# Altium PCB coreboardV0.1pcb.PcbDoc
Units mil, origin at the board's own origin, x right, y up, seen from the top; angles counter-clockwise.
Board outline 1683.26 x 2175.38 mil, 2 copper layers (Top Layer, Bottom Layer), stack 61.855 mil thick; 41 components, 94 nets, 325 pads, 137 vias.
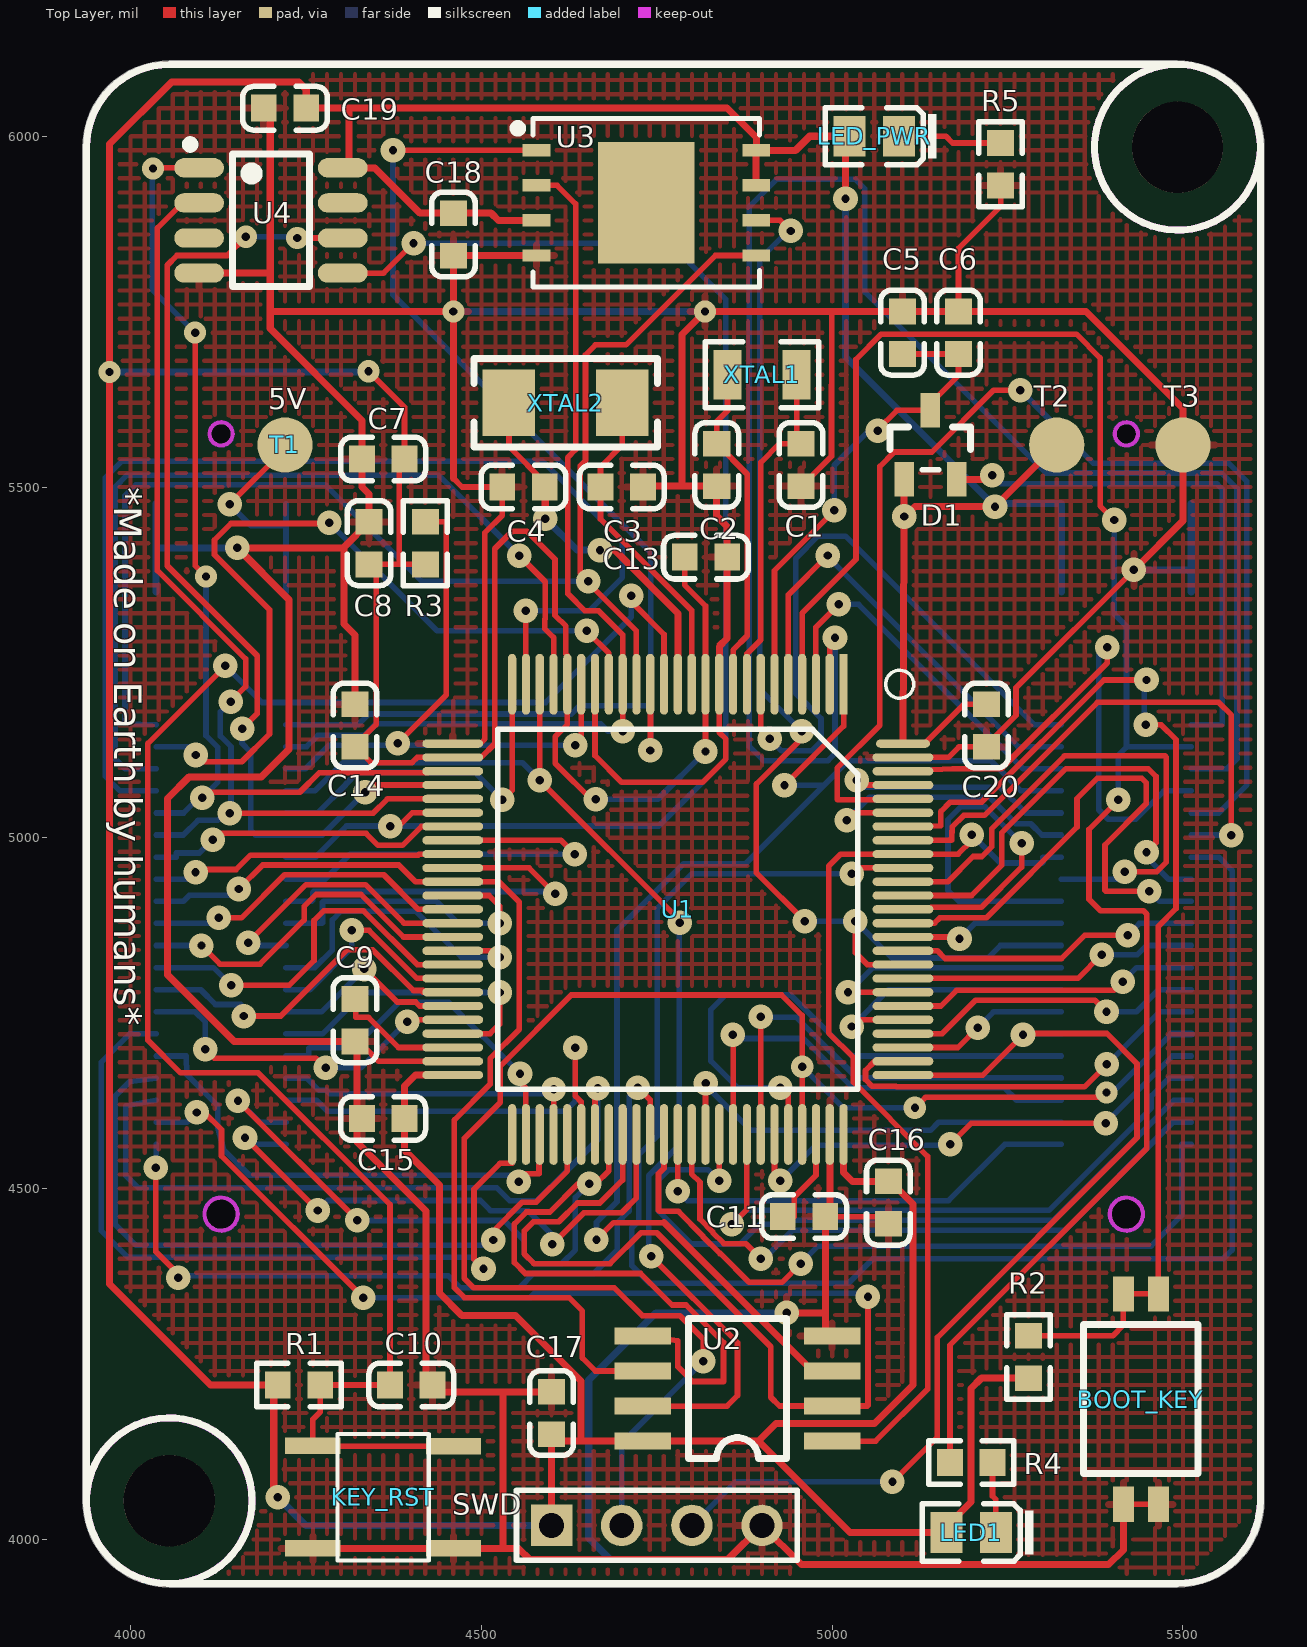
[diagram p0: Top Layer view]
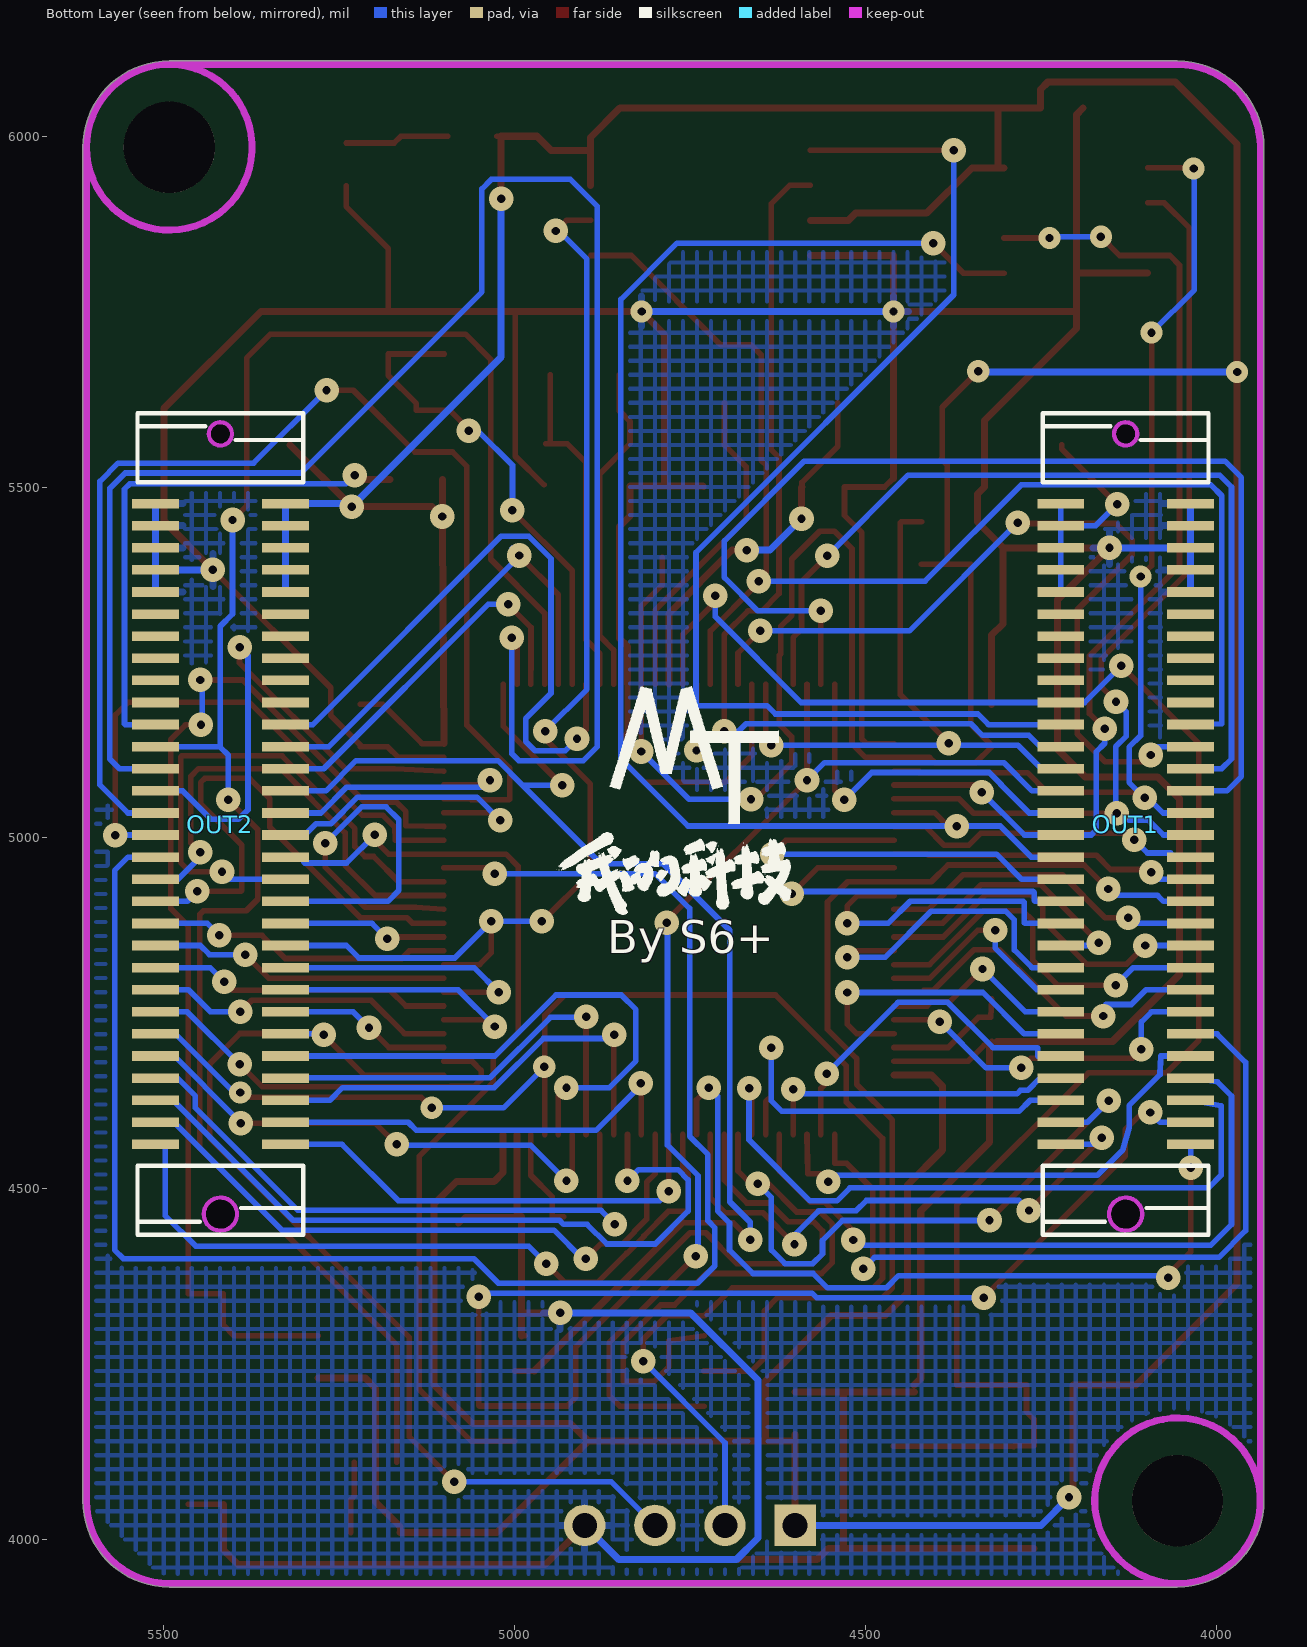
[diagram p1: Bottom Layer view, seen from below]
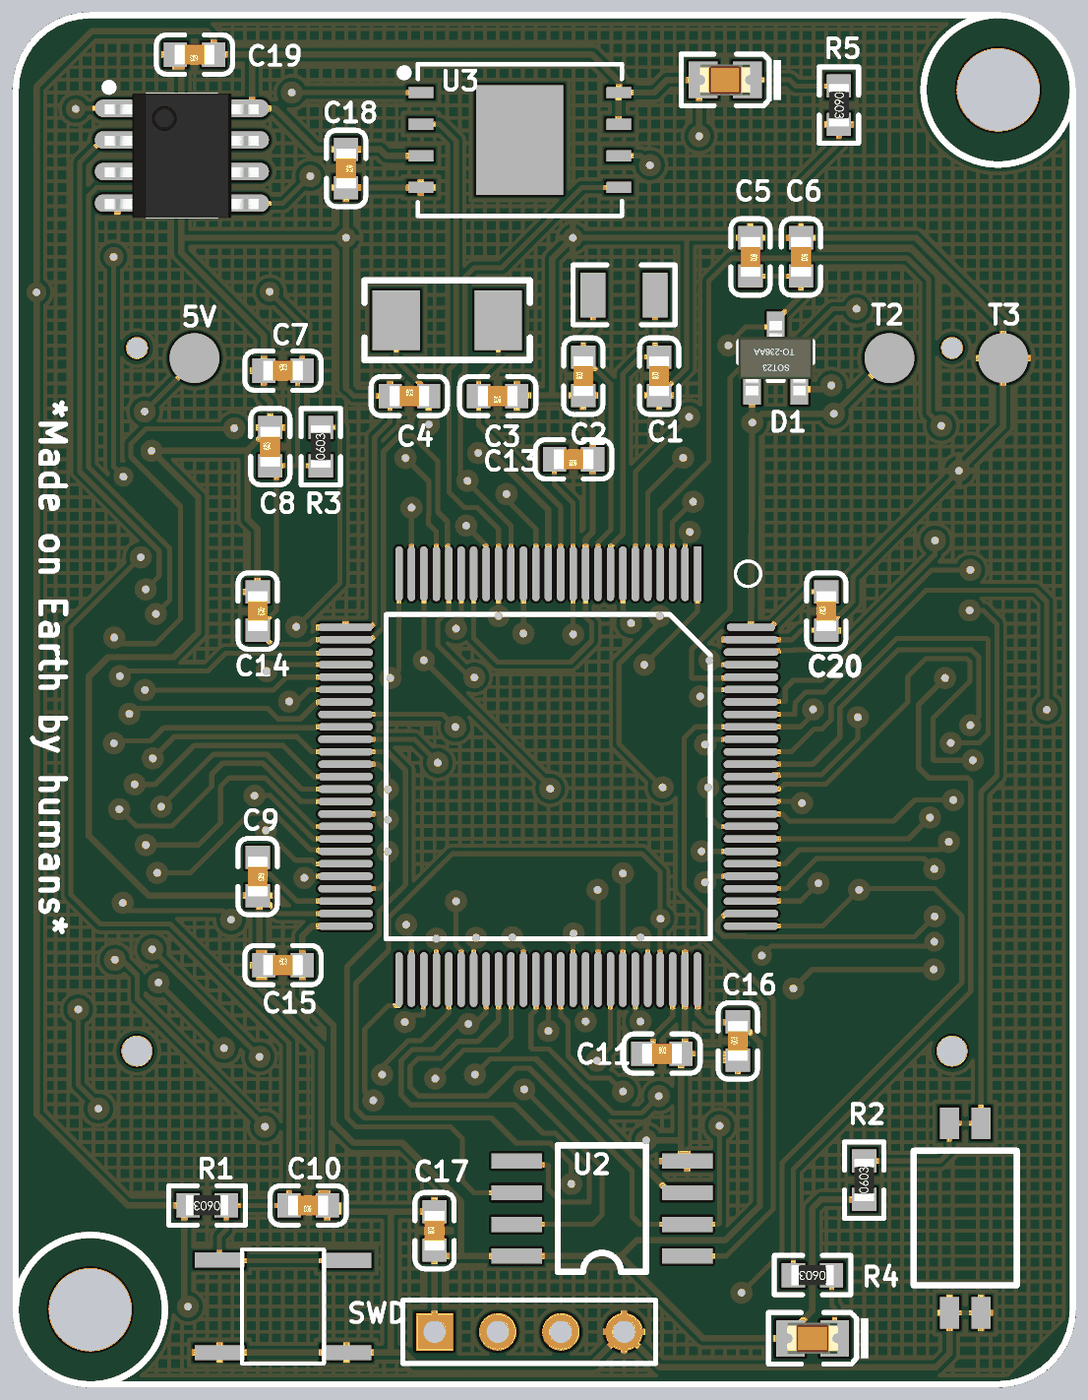
[diagram p2: 3D render of the assembled board from above, using the file's embedded part models]

## Layer stack, top to bottom
Top Solder: solder mask 0.4, Solder Resist, Dk 3.5
Top Layer: signal copper 1.4
Dielectric1: dielectric 59.0551, FR-4, Dk 4.8
Bottom Layer: signal copper 1.4
Bottom Solder: solder mask 0.4, Solder Resist, Dk 3.5

## Board outline
4055.12,3931.99 cw(c4055.12,4055.12) 3931.99,4055.12 3931.99,5984.25 cw(c4055.12,5984.25) 4055.12,6107.38 5492.13,6107.38 cw(c5492.13,5984.25) 5615.25,5984.25 5615.25,4055.12 cw(c5492.13,4055.12) 5492.13,3931.99

## Design rules (kind name [scope] priority, off if disabled: settings)
Clearance [All] p1: gap=6 ignorepadtopadclearanceinfootprint=FALSE except(0: Arc-Hole Track-Hole SMDPad-Hole THPad-Hole Via-Hole Fill-Hole Poly-Hole Region-Hole Text-Hole)
ComponentClearance [All] p1 off: gap=10 collisioncheckmode=3 verticalgap=10 showdistances=FALSE
FabricationTestPointUsage TestPointUsage [All] p1: valid=0 allowmultiple=FALSE
FabricationTestpoint Testpoint [All] p1: side=3 testpointundercomponent=TRUE minsize=40 maxsize=100 preferedsize=60 minholesize=0 maxholesize=40 preferedholesize=32 testpointgrid=1 allowsidetop=TRUE allowsidebottom=TRUE usegrid=TRUE gridtolerance=0.01
MinimumSolderMaskSliver [All] p1: minsoldermaskwidth=6
PolygonConnect [All] p1: connectstyle=Relief reliefconductorwidth=10 reliefentries=4 polygonreliefangle="90 Angle" airgapwidth=10
RoutingVias [All] p1: holewidth=12 width=35 viastyle="Through Hole" minholewidth=11 minwidth=31 maxholewidth=200 maxwidth=200
SilkToSilkClearance [All] p1 off: silktosilkclearance=10
SilkToSolderMaskClearance SilkscreenOverComponentPads [IsPad] p1 off: minsilkscreentomaskgap=10 clearancetoexposedcopper=TRUE
SolderMaskExpansion [All] p1: expansion=4
Width [All] p1: maxlimit=20 minlimit=6 preferedwidth=8
24 further rules are at their usual default settings.

## Components (designator, comment, footprint, x,y, rotation, side; value= is the part's Value field where it differs from the comment)
BOOT_KEY "KE_2" KE_2_1.27 5440,4200 r270 top
C1 "6pF" 0603_C 4955.43,5531.5 r90 top
C2 "6pF" 0603_C 4835.43,5531.5 r90 top
C3 "22pF" 0603_C 4700,5500 r180 top
C4 "22pF" 0603_C 4560,5500 r0 top
C5 "100nF" 0603_C 5100,5720 r270 top
C6 "10uF" 0603_C 5180,5720 r270 top
C7 "100nF" 0603_C 4360,5540 r0 top
C8 "1uF" 0603_C 4340,5420 r90 top
C9 "1uF" 0603_C 4320,4740 r270 top
C10 "100nF" 0603_C 4400,4220 r180 top
C11 "1uF" 0603_C 4960,4460 r0 top
C13 "100nF" 0603_C 4820,5400 r180 top
C14 "100nF" 0603_C 4320,5160 r270 top
C15 "100nF" 0603_C 4360,4600 r0 top
C16 "100nF" 0603_C 5080,4480 r90 top
C17 "100nF" 0603_C 4600,4180 r90 top
C18 "100nF" 0603_C 4460,5860 r270 top
C19 "100nF" 0603_C 4220,6040 r180 top
C20 "100nF" 0603_C 5220,5160 r90 top
D1 "BAT54C" BAT54C 5140,5560 r90 top
KEY_RST "KEY_SMT" KEY_SMT 4360,4060 r180 top
LED1 "0805_LED" 0805_LED 5198.27,4009.76 r0 top
LED_PWR "0805_LED" 0805_LED 5060,6000 r0 top
OUT1 "3710F" 3710F060046G3FT01 4035.43,5476.38 r180 bottom locked
OUT2 "3710F" 3710F060046G3FT01 5325.79,5476.38 r180 bottom locked
R1 "10K" 0603_R 4240,4220 r180 top
R2 "10K" 0603_R 5280,4260 r90 top
R3 "0R" 0603_R 4420,5420 r90 top
R4 "1K" 0603_R 5198.27,4109.76 r180 top
R5 "1K" 0603_R 5240,5960 r270 top
SWD "Header_2.54_4P" HDR1_4P 4600,4020 r0 top
T1 "5V" TEST_POINT_2mm 4220,5560 r0 top locked
T2 "3V3" TEST_POINT_2mm 5320,5560 r0 top locked
T3 "GND" TEST_POINT_2mm 5500,5560 r0 top locked
U1 "STM32H750VBT6" LQFP100 4780,4900 r270 top locked
U2 "W25Q64" SOIC8-208MIL 5000,4140 r180 top
U3 "W25Q256" WSON8 4580,5980 r0 top
U4 "LY68L6400" SOP8-150MIL 4200,5880 r0 top
XTAL1 "32.768K" XTAL_32.768_3215_2 4900,5660 r0 top
XTAL2 "25M" XTAL_5032_2 4620,5620 r0 top

## Footprints (in the part's own frame and the unit in brackets; to place one, negate y for a bottom-side part, rotate by r counter-clockwise, add the part's x,y. Pads: shape width x height; smd on the part's side, far side on the other; paste and mask are expansions set on the pad)
0603_C [mm]
  rect 0.93x0.98 smd: 1(-0.77,0) 2(0.77,0)
  silkscreen extent -1.54,-0.79 1.54,0.79, body extent -0.8,-0.4 0.8,0.4, height 0.3
0603_R [mm]
  rect 0.93x0.98 smd: 1(-0.77,0) 2(0.77,0)
  silkscreen extent -1.54,-0.79 1.54,0.79, body extent -0.85,-0.4 0.85,0.4, height 0.56
0805_LED [mm]
  rect 1.16x1.47 smd: A(-0.89,0) K(0.89,0)
  silkscreen extent -1.77,-1.03 2.25,1.04, body extent -1.01,-0.62 1.01,0.63, height 1.1
3710F060046G3FT01 [mm]
  rect 1.7x0.35 smd: 1(-4.725,0) 2(-4.725,-0.8) 3(-4.725,-1.6) 4(-4.725,-2.4) 5(-4.725,-3.2) 6(-4.725,-4) 7(-4.725,-4.8) 8(-4.725,-5.6) 9(-4.725,-6.4) 10(-4.725,-7.2) 11(-4.725,-8) 12(-4.725,-8.8) 13(-4.725,-9.6) 14(-4.725,-10.4) 15(-4.725,-11.2) 16(-4.725,-12) 17(-4.725,-12.8) 18(-4.725,-13.6) 19(-4.725,-14.4) 20(-4.725,-15.2) 21(-4.725,-16) 22(-4.725,-16.8) 23(-4.725,-17.6) 24(-4.725,-18.4) 25(-4.725,-19.2) 26(-4.725,-20) 27(-4.725,-20.8) 28(-4.725,-21.6) 29(-4.725,-22.4) 30(-4.725,-23.2) 31(-0.025,-23.2) 32(-0.025,-22.4) 33(-0.025,-21.6) 34(-0.025,-20.8) 35(-0.025,-20) 36(-0.025,-19.2) 37(-0.025,-18.4) 38(-0.025,-17.6) 39(-0.025,-16.8) 40(-0.025,-16) 41(-0.025,-15.2) 42(-0.025,-14.4) 43(-0.025,-13.6) 44(-0.025,-12.8) 45(-0.025,-12) 46(-0.025,-11.2) 47(-0.025,-10.4) 48(-0.025,-9.6) 49(-0.025,-8.8) 50(-0.025,-8) 51(-0.025,-7.2) 52(-0.025,-6.4) 53(-0.025,-5.6) 54(-0.025,-4.8) 55(-0.025,-4) 56(-0.025,-3.2) 57(-0.025,-2.4) 58(-0.025,-1.6) 59(-0.025,-0.8) 60(-0.025,0)
  Keep-Out Layer circle w0.152: c-2.375,-25.725 r0.6
  Keep-Out Layer circle w0.152: c-2.375,2.525 r0.42
  silkscreen extent -5.38,-26.47 0.63,3.28
BAT54C [mm]
  rect 1.25x0.7 smd: 1(-1.25,0.95) 2(-1.25,-0.95) 3(1.25,0)
  silkscreen extent -0.9,-1.46 0.65,1.46, body extent -1.5,-1.5 1.5,1.5, height 1.3
HDR1_4P [mm]
  rect 1.5x1.5 hole 0.9: 1(0,0)
  round 1.5 hole 0.9: 2(2.54,0) 3(5.08,0) 4(7.62,0)
  silkscreen extent -1.27,-1.27 8.89,1.27
KE_2_1.27 [mm]
  rect 1.27x0.76 smd: 1(-3.81,0.635) 2(-3.81,-0.635) 3(3.81,-0.635) 4(3.81,0.635)
  silkscreen extent -2.7,-2.07 2.7,2.07
KEY_SMT [mm]
  rect 2x0.6 smd: 1(-2.55,-1.85) 1(2.55,-1.87) 2(-2.55,1.85) 2(2.55,1.85)
  silkscreen extent -1.65,-2.29 1.65,2.29
LQFP100 [mm]
  rect 2.2x0.3 smd: 1(-8.1,6)
  oval 2.2x0.3 smd: 2(-8.1,5.5) 3(-8.1,5) 4(-8.1,4.5) 5(-8.1,4) 6(-8.1,3.5) 7(-8.1,3) 8(-8.1,2.5) 9(-8.1,2) 10(-8.1,1.5) 11(-8.1,1) 12(-8.1,0.5) 13(-8.1,0) 14(-8.1,-0.5) 15(-8.1,-1) 16(-8.1,-1.5) 17(-8.1,-2) 18(-8.1,-2.5) 19(-8.1,-3) 20(-8.1,-3.5) 21(-8.1,-4) 22(-8.1,-4.5) 23(-8.1,-5) 24(-8.1,-5.5) 25(-8.1,-6) 51(8.2,-6) 52(8.2,-5.5) 53(8.2,-5) 54(8.2,-4.5) 55(8.2,-4) 56(8.2,-3.5) 57(8.2,-3) 58(8.2,-2.5) 59(8.2,-2) 60(8.2,-1.5) 61(8.2,-1) 62(8.2,-0.5) 63(8.2,0) 64(8.2,0.5) 65(8.2,1) 66(8.2,1.5) 67(8.2,2) 68(8.2,2.5) 69(8.2,3) 70(8.2,3.5) 71(8.2,4) 72(8.2,4.5) 73(8.2,5) 74(8.2,5.5) 75(8.2,6)
  oval 0.3x2.2 smd: 26(-5.95,-8.15) 27(-5.45,-8.15) 28(-4.95,-8.15) 29(-4.45,-8.15) 30(-3.95,-8.15) 31(-3.45,-8.15) 32(-2.95,-8.15) 33(-2.45,-8.15) 34(-1.95,-8.15) 35(-1.45,-8.15) 36(-0.95,-8.15) 37(-0.45,-8.15) 38(0.05,-8.15) 39(0.55,-8.15) 40(1.05,-8.15) 41(1.55,-8.15) 42(2.05,-8.15) 43(2.55,-8.15) 44(3.05,-8.15) 45(3.55,-8.15) 46(4.05,-8.15) 47(4.55,-8.15) 48(5.05,-8.15) 49(5.55,-8.15) 50(6.05,-8.15) 76(6.05,8.15) 77(5.55,8.15) 78(5.05,8.15) 79(4.55,8.15) 80(4.05,8.15) 81(3.55,8.15) 82(3.05,8.15) 83(2.55,8.15) 84(2.05,8.15) 85(1.55,8.15) 86(1.05,8.15) 87(0.55,8.15) 88(0.05,8.15) 89(-0.45,8.15) 90(-0.95,8.15) 91(-1.45,8.15) 92(-1.95,8.15) 93(-2.45,8.15) 94(-2.95,8.15) 95(-3.45,8.15) 96(-3.95,8.15) 97(-4.45,8.15) 98(-4.95,8.15) 99(-5.45,8.15)
  oval 0.3x1.95 smd: 100(-5.95,8.15)
  silkscreen extent -8.61,-6.51 6.56,8.54
SOIC8-208MIL [mil]
  rect 80x24 smd: 1(0,0) 2(0,-50.06) 3(0,-100.06) 4(0,-150.06) 5(270,-150) 6(270,-100) 7(270,-50) 8(270,0)
  silkscreen extent 65,-175 205,25
SOP8-150MIL [mm]
  oval 1.8x0.7 smd: 1(-2.6,1.905) 2(-2.6,0.635) 3(-2.6,-0.635) 4(-2.6,-1.905) 5(2.6,-1.905) 6(2.6,-0.635) 7(2.6,0.635) 8(2.6,1.905)
  silkscreen extent -3.07,-2.4 1.4,2.9, body extent -3.1,-2.5 3.1,2.5, height 1.75
TEST_POINT_2mm [mm]
  round 2 smd: 1(0,0)
WSON8 [mm]
  rect 1x0.45 smd: 1(-0.038,0) 2(-0.038,-1.27) 3(-0.038,-2.54) 4(-0.038,-3.81) 5(7.912,-3.81) 6(7.912,-2.54) 7(7.912,-1.27) 8(7.912,0)
  rect 3.5x4.4 smd: 9(3.937,-1.905)
  silkscreen extent -0.86,-4.95 8.04,1.14
XTAL_32.768_3215_2 [mm]
  rect 1x1.8 smd: 1(-1.25,0) 2(1.25,0)
  silkscreen extent -2.05,-1.2 2.05,1.2
XTAL_5032_2 [mm]
  rect 1.9x2.4 smd: 1(-2.05,0) 2(2.05,0)
  silkscreen extent -3.33,-1.6 3.33,1.6

## Part data
BOOT_KEY: library part KE_2_1.27
C1 C2 C3 C4 C5 C6 C7 C8 C9 C10 C11 C13 C14 C15 C16 C17 C18 C19 C20: library part 0603_CAP
OUT1 OUT2: library part 3710F_30*2pin
R1 R2 R3 R4 R5: library part 0603_RES
T1 T2 T3: library part TEST_POINT_2mm
XTAL1: library part XTAL_32.768_3215_2
XTAL2: library part XTAL_8MHz_5032_2

## Free pads (board coordinates)
  round 129.92 hole 129.92: 0(4055,4055) 0(5492.13,5984.25)
  round 47.24 hole 47.24: 0(4129,4464) 0(5419,4464)
  round 33.07 hole 33.07: 0(4129,5576) 0(5419,5576)

## Via types
v1: diameter 35, hole 12, Top Layer to Bottom Layer, tented both sides, 125 vias
v2: diameter 31.5, hole 11.81, Top Layer to Bottom Layer, tented both sides, 10 vias
v3: diameter 32, hole 12, Top Layer to Bottom Layer, tented both sides, 2 vias

## Nets (pads, with @x,y where several pads share a name; then routed paths per layer and width w, separated by ;. In a path a pad name is that pad's centre, name@x,y a point inside that pad or via, vN(x,y) a via of type N, cw(c..) or ccw(c..) an arc to the next point about the centre after c; other vN are vias at no path point)
3V3: C7.2 C8.1 C13.2 C14.2 C15.2 C16.2 C17.1 C18.1 C19.1 C20.2 D1.1 LED1.A LED_PWR.A OUT2.56 OUT2.57 OUT2.58 OUT2.59 OUT2.60 R1.2 R2.1 R3.1 SWD.1 T2.1 U1.11 U1.21 U1.27 U1.50 U1.75 U1.100 U2.8 U3.3 U3.7 U3.8 U4.8 | length 10665
  Top Layer w8: C14.2@4319.09,5130.59 4350,5161.5 4350,5389.69 R3.1 ; C14.2 4342.6,5107.09 4401.12,5107.09 4408.6,5114.57 U1.27 4499.57,5114.57 4519,5134 4519,5412 4544,5437 4565,5437 4604.97,5397.03 4604.97,5317 4620.31,5301.66 4620.31,5262.3 4622.52,5260.09 U1.21 4622.52,5161.52 4605,5144 4605,5106.22 v1@4661,5050.22 ; v2(4339,5665) 4390.32,5613.68 C7.2 ; 4383,5389.69 4383,5531 C7.2@4392,5540 ; C13.2 4789.69,5360.31 4819.37,5330.63 U1.11 v1(4819.37,5123) ; U3.8 U3.8@4892,5980 ; LED_PWR.A@5019,6000 LED_PWR.A ; U1.100 5132,5134.25 5188.06,5190.32 C20.2 ; v1@5102.6,5458.4 v1@5103.45,5457.55 ; LED1.A@5163.23,4009 LED1.A@5163.23,4018.23
  Top Layer w10: v1(4209.68,4060) 4204,4065.68 4204,4220 4114,4220 3970,4364 v2(3970,5664) 3970,5989 4058,6077 4240,6077 4250.32,6066.68 C19.1 4850,6040 4892,5998 4892,5980 4948,5980 4968,6000 5019,6000 v1(5019,5911) ; U4.8 4348,5955 4412.68,5890.32 C18.1 4514,5890.32 4524.32,5880 U3.3 ; U4.8@4311,5955 4311,6040 ; U1.50 4405.81,4661.81 4390.31,4646.31 C15.2 4390.31,4554.69 4440,4505 4440,4351 4472,4319 4548.62,4319 4642,4225.62 4642,4140 ; SWD.1 C17.1 ; C17.1@4600,4140 U2.8 4895,4140 ; U3.7 U3.8 ; U1.75 5016.22,4522.78 5029,4510 5083,4510 5115,4478 5115,4219.8 5060.2,4165 4920,4165 4895,4140 ; U1.100 5102.6,5438.1 D1.1 ; v1@5103.45,5457.55 5117.95,5472.05 v1(5232.05,5472.05) T2.1 ; LED1.A 5025.24,4009.76 4895,4140 ; LED1.A@5163.23,4018.23 5198,4053 5198,4215.19 5212.5,4229.69 R2.1
  Bottom Layer w8: v1(4663,5055) 4751.37,5055 v1(4819.37,5123) ; v1@5227.72,5476.38 v1(5232.05,5472.05)
  Bottom Layer w10: v2(3970,5664) v2@4338,5664 ; v1(4209.68,4060) 4249.68,4020 SWD.1 ; v1(5019,5911) 5019,5685.1 5227.72,5476.38 OUT2.60 OUT2.59 OUT2.58 OUT2.57 OUT2.56
  other v1: 5103,5458
5V: OUT1.1 OUT1.2 OUT1.3 OUT1.4 OUT1.5 T1.1 | length 336.2
  Top Layer w8: v1(4141.12,5475.5) 4220,5554.38 T1.1
  Bottom Layer w8: v1(4141.12,5475.5) 4171.74,5444.88 OUT1.2 ; OUT1.5 OUT1.4 OUT1.3 OUT1.2 ; OUT1.1 OUT1.2
BOOT0: BOOT_KEY.1 BOOT_KEY.2 R2.2 U1.94 | length 1596.1
  Top Layer w8: U1.94 5155,5017.14 5155,5037.5 5168.18,5050.68 5213.09,5050.68 5387.42,5225 v1@5445,5225 ; R2.2 5400,4290.32 5415,4305.32 BOOT_KEY.2 BOOT_KEY.1 5465,4874 5490,4899 5490,5140 5469,5161 v1@5445,5161
  Bottom Layer w8: v1@5445,5161 v1@5445,5225
  other v1: 5447,5161 5448,5225
GND: BOOT_KEY.3 BOOT_KEY.4 C1.1 C2.1 C3.1 C4.1 C5.1 C6.1 C7.1 C8.2 C9.2 C10.1 C11.2 C13.1 C14.1 C15.1 C16.1 C17.2 C18.2 C19.2 C20.1 KEY_RST.2 OUT1.56 OUT1.57 OUT1.58 OUT1.59 OUT1.60 OUT2.1 OUT2.2 OUT2.3 OUT2.4 OUT2.5 R5.2 SWD.4 T3.1 U1.10 U1.19 U1.26 U1.49 U1.74 U1.99 U2.4 U3.4 U4.4 | length 10955.9
  Top Layer w8: C9.2@4312.5,4710 4323.28,4699.22 C9.2 ; C9.2@4331,4704 4353.5,4681.5 U1.49 ; C8.2@4340,5450 C8.2 ; U1.26 4498.44,5134.25 4505,5140.81 4505,5435 4529.69,5459.69 C4.1 4472.5,5500 4460,5512.5 ; U1.19 4661.89,5117.11 4700,5079 4815,5079 4848.5,5112.5 4848.5,5140.61 4839.06,5150.05 U1.10 ; C3.1 C3.1@4731.5,5501.18 ; C1.1@4958,5503 4999,5543.93 4999.18,5750.32 ; U2.4@4985,4290.06 U2.4@4990.32,4290.06 ; C11.2@4996.54,4466.22 C11.2 5069.68,4460 C16.1 ; U1.99 5165.57,5114.57 5180.69,5129.69 C20.1 ; C6.1 5180,5840 5240,5900 R5.2 ; C20.1@5218.59,5131.09 5262,5174.5 5262,5213.89 v1(5430,5381.89) ; BOOT_KEY.3 BOOT_KEY.4
  Top Layer w10: U4.4 4199,5805 ; C19.2 4199,6030.69 4199,5726 4330,5595 4330,5500 4340,5490 C8.2 ; 4199,5750.32 v2@4457.76,5750.32 ; KEY_RST.2@4259.61,3987.17 4460.39,3987.17 4552.83,3987.17 4569,3971 4851,3971 SWD.4 4956,3964 5394,3964 5415,3985 BOOT_KEY.3 ; 4304.5,5414.5 C8.2@4340,5450 ; C9.2@4312.5,4710 4147.31,4710 4052.5,4804.81 4052.5,5056 4083.5,5087 4186.76,5087 4226,5126.24 4226,5339.39 v1(4152,5413.39) 4304,5413.39 4304,5305 4320,5289 C14.1 ; C9.2@4322.68,4704 4322.68,4566.32 4421,4468 4421,4229.31 C10.1 ; C10.1@4430,4210.32 C17.2 ; 4460,5512.5 C18.2 U3.4@4578,5829.69 ; 4531,3987.17 4531,4210.32 ; C3.1@4731.5,5501.18 4786,5501.18 ; U1.10 4839.06,5273 4850.32,5284.26 4850.32,5443.68 4835.43,5458.57 C2.1 4786,5501.18 ; v1(4935,4323) 4989.32,4323 ; U2.4@4990.32,4290.06 C11.2 ; C11.2@4996.54,4466.22 U1.74 ; v1(5430,5381.89) 5500,5451.89 T3.1 5500,5612 5361.68,5750.32 C6.1 C5.1 v2(4818.82,5750.32) 4786,5717.5 4786,5501.18
  Bottom Layer w10: OUT1.56 OUT1.57 OUT1.58 ; OUT1.60 OUT1.59 OUT1.58 ; v1(4152,5413.39) OUT1.58 ; v2(4460,5750.32) v2(4818.82,5750.32) ; SWD.4 4851,3971 4684,3971 4653,4002 4653,4227 4749,4323 v1(4935,4323) ; v1(5430,5381.89) OUT2.4 ; OUT2.5 OUT2.4 ; OUT2.1 OUT2.2 OUT2.3 OUT2.4
NetC1_2: C1.2 U1.8 XTAL1.2 | length 490.8
  Top Layer w8: U1.8 4878.43,5262.43 4898.27,5282.27 4898.27,5535.08 4925,5561.81 C1.2 ; C1.2@4949.21,5561.81 XTAL1.2
NetC2_2: C2.2 U1.9 XTAL1.1 | length 473.9
  Top Layer w8: XTAL1.1 4850.79,5608.79 4835.43,5593.43 C2.2 4879,5518.25 4879,5288 4858.74,5267.74 U1.9
NetC3_2: C3.2 U1.12 XTAL2.2 | length 467.8
  Top Layer w8: XTAL2.2 4700.71,5559.71 4669.69,5528.69 C3.2 4669.69,5454.31 4799.69,5324.31 U1.12
NetC4_2: C4.2 U1.13 XTAL2.1 | length 532.4
  Top Layer w8: XTAL2.1 4539.29,5557.71 4590.32,5506.68 C4.2
  Top Layer w10: C4.2 4591,5499.32 v1(4591,5455) ; v1(4669,5410) 4690,5410 4780,5320 U1.13
  Bottom Layer w10: v1(4591,5455) 4636,5410 v1(4669,5410)
NetC9_1: C9.1 U1.48 | length 182.2
  Top Layer w8: C9.1 4321,4744 4339,4744 4381.82,4701.18 U1.48
NetC11_1: C11.1 U1.73 | length 146.3
  Top Layer w8: C11.1 4946,4460 4946,4488.15 4976.85,4519 U1.73
NetLED1_K: LED1.K R4.1 | length 102
  Top Layer w8: R4.1 5228.58,4061.73 5233.31,4057 LED1.K
NetLED_PWR_K: LED_PWR.K R5.1 | length 149
  Top Layer w8: LED_PWR.K 5162,6000 5171.69,5990.31 R5.1
NRST: C10.2 KEY_RST.1 OUT1.10 R1.1 U1.14 | length 2496.1
  Top Layer w8: v1(4135,5245) 4024.5,5134.5 4024.5,4711.5 4071,4665 4181.98,4665 4369.68,4477.29 C10.2 R1.1 4270.31,4181.71 4259.61,4171 4259.61,4133.62 4287,4133.62 4288.62,4132 4289.46,4132.83 KEY_RST.1@4460.39,4132.83 ; v1(4713.82,5345) 4713.82,5336.5 4760.32,5290 U1.14
  Bottom Layer w8: v1@4135,5242.91 4137.5,5242.91 4187.5,5192.91 OUT1.10 4591.62,5192.91 4713.82,5315.11 v1(4713.82,5345)
PA0: OUT1.48 U1.22 | length 1286.1
  Top Layer w8: v1(4554,5402) 4590.97,5365.03 4590.97,5312.11 4590.51,5311.65 4590.51,5297.77 4602.84,5285.45 U1.22
  Bottom Layer w8: OUT1.48 3992.07,5098.43 3978,5112.5 3978,5500 3995,5517 4439,5517 v1(4554,5402)
PA1: OUT1.14 U1.23 U2.7 | length 1696.1
  Top Layer w8: U1.23 v1(4583.15,5082.09) 4583.15,5081.85 v1@4784.5,4880.5 ; U2.7 4850,4190 4865,4205 4865,4280.5 v1(4742,4403.5)
  Bottom Layer w8: OUT1.14 4262.5,5066.93 4302.66,5107.09 4558.15,5107.09 v1(4583.15,5082.09) ; v1(4742,4403.5) 4738.5,4407 4738.5,4518.5 4782,4562 v1@4782,4879
  other v1: 4783,4879
PA2: OUT1.47 U1.24 | length 1614.7
  Top Layer w8: U1.24 v1(4563.47,5323.5)
  Bottom Layer w8: OUT1.47 3984.57,5066.93 3964,5087.5 3964,5513.5 3987.5,5537 4587,5537 4701,5423 4701,5371.07 4653.42,5323.5 v1(4563.47,5323.5)
PA3: OUT1.15 U1.25 | length 519.6
  Top Layer w8: v1(4530,5054) 4543.78,5067.78 U1.25
  Bottom Layer w8: OUT1.15 4266.43,5035.43 4306.7,5075.7 4306.7,5076.39 4323.4,5093.09 4490.91,5093.09 v1(4530,5054)
PA4: OUT1.46 U1.28 U4.1 | length 1465.3
  Top Layer w8: v2(4032,5954) 4033,5955 U4.1 ; v2(4092,5720) 4092,5388 v2(4107.5,5372.5) ; v1@4105.01,5065 4241,5065 4269,5093 4423,5093 4423,5094.88 U1.28
  Bottom Layer w8: v2(4032,5954) 4039,5947 4031,5939 4031,5781 v2(4092,5720) ; OUT1.46 4075.44,5035.43 v1@4105.01,5065 ; v1(4102,5057) 4124,5079 4124,5129.2 4107.5,5145.7 v2(4107.5,5372.5)
PA5: OUT1.16 U1.29 U4.6 | length 1460.5
  Top Layer w8: v1(4158.94,5155.44) 4180.54,5177.04 4180.54,5259.46 4052.2,5387.8 4052.2,5816.2 4066,5830 4137.5,5830 v2(4164.25,5856.75) ; v2(4237.5,5855) U4.6 ; v1(4334.2,5065) 4344.39,5075.2 U1.29
  Bottom Layer w8: v1@4158.75,5155.25 4158.75,5134.75 4171,5122.5 4171,5010.94 4178,5003.94 OUT1.16 4273.13,5003.94 v1(4334.2,5065) ; v2(4164.25,5856.75) 4235.75,5856.75 v2(4237.5,5855)
PA6: OUT1.45 U1.30 U4.2 | length 1427.1
  Top Layer w8: U4.2 4074,5905 4038.2,5869.2 4038.2,5380.8 4164,5255 4164,5215.5 v1(4142.71,5194.21) ; v1(4141.56,5035) 4345.68,5035 4366.19,5055.51 U1.30
  Bottom Layer w8: OUT1.45 4075,5003.94 4096,5024.94 4124,5024.94 v1@4136.56,5037.5 ; v1(4141.56,5035) 4135.92,5040.64 4143,5047.71 4143,5130 4128,5145 4128,5179.5 v1(4142.71,5194.21)
PA7: OUT1.17 U1.31 U4.5 | length 2034.2
  Top Layer w8: U4.5 4360.5,5805 v1(4403.25,5847.75) ; v1(4369.95,5016.77) 4382.45,5016.77 4401.51,5035.83 U1.31
  Bottom Layer w8: OUT1.17 4263.44,4972.44 4307.77,5016.77 v1(4369.95,5016.77) 4752.77,5016.77 4848.5,5112.5 4848.5,5767.5 4768.25,5847.75 v1(4403.25,5847.75)
PA8: OUT2.33 U1.67 | length 629.3
  Top Layer w8: U1.67 v1@4858.74,4702.24
  Bottom Layer w8: v1@4859,4714 4959,4714 5029,4644 5245,4644 5263.02,4625.98 OUT2.33
  other v1: 4858,4719
PA9: OUT2.27 U1.68 | length 888.2
  Top Layer w8: v1(4857,4449) 4878.43,4470.43 U1.68
  Bottom Layer w8: v1(4857,4449) 4876.86,4468.86 5308.86,4468.86 5455,4615 5455,4632 5480.48,4657.48 OUT2.27
PA10: OUT2.34 U1.69 | length 632.4
  Top Layer w8: U1.69 v1@4898.11,4745
  Bottom Layer w8: v1@4898,4744 4949,4744 5035,4658 5326.25,4658 OUT2.34
  other v1: 4898,4745
PA11: OUT2.26 U1.70 | length 729.9
  Top Layer w8: U1.70 4917.8,4519.2 v1(4926,4511) ; v1(5168,4563) 5198,4593 5381,4593 v1@5389,4601
  Bottom Layer w8: v1(4926,4511) 4977,4562 v1@5168,4562 ; v1@5387,4603 5399,4603 5484.98,4688.98 OUT2.26
  other v1: 5390,4593
PA12: OUT2.35 U1.71 | length 803.9
  Top Layer w8: v1(4926,4644) 4937.48,4632.52 U1.71
  Bottom Layer w8: v1(4926,4644) 4864.89,4644 4827,4681.89 4827,4755 4848,4776 4941,4776 5028.02,4688.98 OUT2.35
PA15: OUT2.24 U1.77 | length 584.7
  Top Layer w8: U1.77 5060.65,4681.5 5047.56,4668.4 5047.56,4655.22 5056.88,4645.91 5090.89,4645.91 5091.8,4645 5359.53,4645 v1(5391.5,4676.97)
  Bottom Layer w8: v1(5391.5,4676.97) 5466.5,4751.97 OUT2.24
PB0: OUT1.43 U1.34 | length 437.6
  Top Layer w8: v1(4092.5,4950.86) 4096.41,4954.77 4150.36,4954.77 4170.86,4975.27 4409.94,4975.27 4411.45,4976.77 U1.34
  Bottom Layer w8: OUT1.43 4082.59,4940.95 v1(4092.5,4950.86)
PB1: OUT1.19 U1.35 | length 558.5
  Top Layer w8: U1.35 4567.91,4957.09 v1(4605,4920)
  Bottom Layer w8: OUT1.19 4258,4909.45 4259.5,4910.95 4259.5,4922 4261,4923.5 4601.5,4923.5 v1(4605,4920)
PB2: OUT1.42 U1.36 U2.6 | length 1505.9
  Top Layer w8: v1(4154,4927) 4188.27,4961.27 4382.13,4961.27 4406,4937.4 U1.36 4525.04,4937.4 4554,4908.44 4554,4726.97 4512.5,4685.47 4512.5,4648.72 4461.5,4597.72 4461.5,4358.71 4475.71,4344.5 4625,4344.5 4644,4325.5 4644,4258.5 4662.5,4240 U2.6
  Bottom Layer w8: OUT1.42 4075,4909.45 4083.55,4918 4145,4918 v1(4154,4927)
PB3: OUT2.18 U1.89 | length 664.9
  Top Layer w8: U1.89 5198.57,4917.72 5241.56,4960.7 5241.56,5007.05 5333.21,5098.7 5450.3,5098.7 5461.5,5087.5 5461.5,4992.95 v1(5448,4979.45)
  Bottom Layer w8: v1(5448,4979.45) 5448,4972.45 5479.5,4940.95 OUT2.18
PB4: OUT2.43 U1.90 | length 774.3
  Top Layer w8: U1.90 5165.08,4937.4 5200.98,4973.3 5213.36,4973.3 5227.56,4987.5 5227.56,5013.04 5331.21,5116.7 5474.31,5116.7 5476,5115.01 5476,4964.95 5462.5,4951.45 v1(5417,4951.45)
  Bottom Layer w8: OUT2.43 5406.5,4940.95 v1(5417,4951.45)
PB5: OUT2.17 U1.91 | length 2391.3
  Top Layer w8: v1(5028,4949) 5036.09,4957.09 U1.91
  Bottom Layer w8: v1(5028,4949) 4800,4949 4750.5,4899.5 4750.5,4574.54 4724.5,4548.54 4724.5,4454.1 4714.4,4443.99 4714.4,4390 4739.4,4365 5023,4365 5058,4400 5557.5,4400 5570,4412.5 5570,4953.44 5551,4972.44 OUT2.17
PB6: OUT2.44 U1.92 U2.1 | length 1349.9
  Top Layer w8: U2.1 5062,4140 5136,4214 5136,4546 5030.22,4651.78 5030.22,4686.78 4995,4722 4995,4959.5 5012.27,4976.77 U1.92 5179.52,4976.77 5199.11,4996.37 v1(5199.11,5004.39)
  Bottom Layer w8: v1(5199.11,5004.39) 5239.47,4964.03 5299,4964.03 5300.45,4965.48 5300.45,4972.44 OUT2.44
PB7: OUT2.16 U1.93 | length 795.4
  Top Layer w8: U1.93 5170,4996.46 5171,5015.5 5187.5,5032 5217,5032 5378,5193 5551,5193 5569,5175 v1(5569,5003.94)
  Bottom Layer w8: OUT2.16 v1(5569,5003.94)
PB8: OUT2.45 U1.95 | length 427.2
  Top Layer w8: v1(5020.5,5025) 5031.33,5035.83 U1.95
  Bottom Layer w8: v1(5020.5,5025) 5053.5,5058 5223.8,5058 5261.8,5020 5283,5020 5299.06,5003.94 OUT2.45
PB9: OUT2.15 U1.96 | length 1745.7
  Top Layer w8: U1.96 5062,5055.51 5062,5054 5008,5054 5007,5055 5007,5099.5 5068,5160.5 5068,5529.5 5088.5,5550 5142,5550 5230,5638 v1(5268,5638)
  Bottom Layer w8: v1(5268,5638) 5372,5534 5565,5534 5591,5508 5591,5075.43 5551,5035.43 OUT2.15
PB10: OUT1.37 U1.46 | length 507.1
  Top Layer w8: v1(4106.5,4698.49) 4119,4685.99 4264.01,4685.99 v1(4278,4672) ; v1(4394,4738) 4396.55,4740.55 U1.46
  Bottom Layer w8: OUT1.37 4092.03,4751.97 4106.5,4737.5 v1(4106.5,4698.49) ; v1(4278,4672) 4328,4672 v1(4394,4738)
PB11: OUT1.25 U1.47 | length 446.6
  Top Layer w8: U1.47 4512.5,4720.87 4526,4734.37 v1(4526,4779.5)
  Bottom Layer w8: OUT1.25 4273.42,4720.47 4332.45,4779.5 v1(4526,4779.5)
PB12: OUT1.36 U1.51 | length 1131.9
  Top Layer w8: v1(4503,4386) 4489.5,4399.5 4489.5,4499 4526.5,4536 4543.78,4536 U1.51
  Bottom Layer w8: OUT1.36 3998.47,4720.47 3958,4680 3958,4440 3996,4402 4487,4402 v1(4503,4386)
PB13: OUT1.26 U1.52 | length 504.1
  Top Layer w8: v1(4555,4663.97) 4555,4651.47 4563.47,4643 U1.52
  Bottom Layer w8: OUT1.26 4254,4688.98 4254,4700 4255,4701 4318,4701 4382.5,4765.5 4453.47,4765.5 v1(4555,4663.97)
PB14: OUT1.35 U1.53 | length 724.6
  Top Layer w8: v1(4553,4510) 4564,4521 4582.15,4521 U1.53
  Bottom Layer w8: OUT1.35 4079,4688.98 4080,4662.5 4124,4618.5 4124,4587 4133,4555 4169,4519 4544,4519 v1(4553,4510)
PB15: OUT1.27 U1.54 | length 458.2
  Top Layer w8: U1.54 v1(4602.84,4641.84)
  Bottom Layer w8: OUT1.27 4251,4657.48 4268.5,4639.98 4278.99,4639.98 4283.98,4635 4596,4635 v1(4602.84,4641.84)
PC0: OUT1.11 U1.15 U3.1 | length 1902.2
  Top Layer w8: v1(4374,5980) U3.1 ; U1.15 v1(4740.63,5124.5) 4741.32,5125.19 U1.15@4741.32,5188.51
  Bottom Layer w8: OUT1.11 4324.42,5161.42 4339.5,5176.5 4628.19,5176.5 4640.2,5188.51 4741.32,5188.51 ; v1(4374,5980) 4374,5774 4741.32,5406.68 4741.32,5188.51 ; v1(4740.63,5124.5) 4741.32,5125.19 4741.32,5188.51
PC1: OUT1.50 U1.16 U3.5 | length 1903
  Top Layer w8: v1(4652,5365.95) 4641.06,5376.89 4641.06,5530.5 4648.32,5537.76 4648.32,5688.4 4662.5,5702.58 4706.08,5702.58 4833.5,5830 U3.5 ; v1@4656.91,5370.85 4656.91,5359.09 4720.95,5295.05 U1.16
  Bottom Layer w8: OUT1.50 3992,5162.42 3992,5487.5 4007.5,5503 4277.69,5503 4414.74,5365.95 v1(4652,5365.95)
PC2: OUT1.12 U1.17 U3.2 | length 1364.7
  Top Layer w8: U3.2 4608,5930 4634.32,5903.68 4634.32,5553.32 4623,5542 4623,5348 4647.5,5323.5 4667.23,5323.5 4701.26,5289.47 U1.17 v1(4701.26,5152)
  Bottom Layer w8: OUT1.12 4250.77,5129.92 4266.85,5146 4333,5146 4349.5,5162.5 4670,5162.5 4680.5,5152 v1(4701.26,5152)
PC3: OUT1.49 U1.18 | length 1223.1
  Top Layer w8: v1(4093,5118) 4085,5124.92 4101.49,5108.43 4158.43,5108.43 4198,5148 4198,5325 4119.5,5403.5 4119.5,5424.5 4143,5448 v1@4283,5448 ; v1(4650,5295) 4681.58,5263.42 U1.18
  Bottom Layer w8: OUT1.49 4092,5129.92 4085,5124.92 v1(4093,5118) ; v1@4283.5,5448.5 4437,5295 v1(4650,5295)
  other v1: 4283,5449
PC4: OUT1.44 U1.32 | length 458.4
  Top Layer w8: v1(4116.94,4997.44) 4125.77,5006.27 4335.73,5006.27 4352.73,4989.27 4387.5,4989.27 4414.37,5016.14 U1.32
  Bottom Layer w8: OUT1.44 4065,4972.44 4065,4978.36 4097.86,4978.36 v1(4116.94,4997.44)
PC5: OUT1.18 U1.33 | length 608.4
  Top Layer w8: U1.33 4613.31,4996.46 v1(4633,4976.77)
  Bottom Layer w8: OUT1.18 4277.24,4940.95 4313.06,4976.77 v1(4633,4976.77)
PC6: OUT2.31 U1.63 | length 666.6
  Top Layer w8: v1(4780,4496) U1.63
  Bottom Layer w8: v1(4780,4496) 4793.14,4482.86 5165.86,4482.86 5245.99,4562.99 OUT2.31
PC7: OUT2.29 U1.64 | length 930.4
  Top Layer w8: U1.64 4799.69,4521 4811.5,4509.19 4811.5,4456.41 4829.5,4438.41 4829.5,4437.61 4845.61,4421.5 4876.82,4421.5 v1(4898.32,4400)
  Bottom Layer w8: v1(4898.32,4400) 4902.97,4400 4943.83,4440.86 5331.86,4440.86 5485.49,4594.49 OUT2.29
PC8: OUT2.32 U1.65 | length 600.3
  Top Layer w8: U1.65 v1@4819.37,4650
  Bottom Layer w8: v1@4827.5,4639.5 4884,4583 5140,4583 5151.49,4594.49 OUT2.32
  other v1: 4820,4650
PC9: OUT2.28 U1.66 | length 1073.5
  Top Layer w8: v1(4839.06,4511) U1.66
  Bottom Layer w8: v1(4839.06,4511) 4823.06,4527 4767,4527 4752.5,4512.5 4752.5,4468 4799.5,4421 4868.5,4421 4896.48,4448.98 4930,4448.98 4935.88,4454.86 5315.86,4454.86 5486.98,4625.98 OUT2.28
PC10: OUT2.37 U1.78 | length 246.9
  Top Layer w8: U1.78 5179.18,4701.18 v1(5207.5,4729.5)
  Bottom Layer w8: v1(5207.5,4729.5) 5229.97,4751.97 OUT2.37
PC11: OUT2.23 U1.79 | length 450.5
  Top Layer w8: U1.79 5156.87,4720.87 5204.39,4768.39 5374.61,4768.39 v1(5391,4752)
  Bottom Layer w8: v1(5391,4752) 5433.54,4752 5465,4783.46 OUT2.23
PC12: OUT2.38 U1.80 | length 397.3
  Top Layer w8: v1(5028,4731) 5037.55,4740.55 U1.80
  Bottom Layer w8: v1(5028,4731) 5080.46,4783.46 OUT2.38
PC13: OUT2.50 U1.7 | length 947.6
  Top Layer w8: U1.7 4898.11,5153.89 v1(4911,5141)
  Bottom Layer w8: v1(4911,5141) 4928,5124 4970.5,5124 4984,5137.5 4984,5170 4948,5206 4948,5398 4980,5430 5018.92,5430 5287.5,5161.42 OUT2.50
PD0: OUT2.22 U1.81 | length 433.6
  Top Layer w8: U1.81 5155,4760.24 5177.22,4782.46 5401.5,4782.46 v1(5414,4794.96)
  Bottom Layer w8: v1(5414,4794.96) 5434,4814.96 OUT2.22
PD1: OUT2.39 U1.82 | length 397.2
  Top Layer w8: v1(5022.5,4779.92) U1.82
  Bottom Layer w8: v1(5022.5,4779.92) 5057.27,4814.69 5235.5,4814.69 5235.77,4814.96 OUT2.39
PD2: OUT2.21 U1.83 | length 430.3
  Top Layer w8: U1.83 5350.11,4799.61 v1(5384,4833.5)
  Bottom Layer w8: v1(5384,4833.5) 5435.04,4833.5 5448,4846.46 OUT2.21
PD3: OUT2.40 U1.84 U3.6 | length 1653.6
  Top Layer w8: U3.6 4926,5880 v1(4941,5865) ; v1(4956.5,5152) 4956.5,5141.19 4892,5076.69 4892,4950.06 v1(4961.06,4881) ; v1(5033,4881) 5033,4836.29 5050,4819.29 U1.84
  Bottom Layer w8: v1@4939,5867 4896.85,5824.85 4896.85,5211.65 v1(4956.5,5152) ; v1(4961.06,4881) v1(5033,4881) 5085.31,4828.69 5222,4828.69 5239.77,4846.46 OUT2.40
PD4: OUT2.20 U1.85 | length 436.2
  Top Layer w8: U1.85 5150,4838.98 5160.98,4828 5326.86,4828 5359.86,4861 v1(5421,4861)
  Bottom Layer w8: v1(5421,4861) 5437.95,4877.95 OUT2.20
PD5: OUT2.41 U1.86 | length 235.9
  Top Layer w8: U1.86 5179.03,4858.66 v1(5181.5,4856.19)
  Bottom Layer w8: v1(5181.5,4856.19) 5203.26,4877.95 OUT2.41
PD6: OUT2.19 U1.87 | length 765.9
  Top Layer w8: U1.87 5145.85,4878.35 5153.57,4886.07 5219.71,4886.07 5348.9,5015.26 5348.9,5055.9 5377.7,5084.7 5441.52,5084.7 5447.5,5078.72 5447.5,5048.5 5388.81,4989.81 5388.81,4925 5389.86,4923.95 v1(5452,4923.95)
  Bottom Layer w8: v1(5452,4923.95) 5466.5,4909.45 OUT2.19
PD7: OUT2.42 U1.88 | length 629.9
  Top Layer w8: U1.88 5140.97,4901 5212.8,4901 5270,4958.2 v1(5270,4992)
  Bottom Layer w8: v1(5270,4992) 5218,5044 5183,5044 5165,5026 5165,4925 5180.55,4909.45 OUT2.42
PD8: OUT1.34 U1.55 | length 1010.7
  Top Layer w8: v1(4517,4426.75) 4517,4439.5 4558.18,4480.68 4578.2,4480.68 4622.52,4525 U1.55
  Bottom Layer w8: OUT1.34 3998,4652 3978,4632 3978,4448.75 4007.75,4419 4509.25,4419 v1(4517,4426.75)
PD9: OUT1.28 U1.56 | length 628.6
  Top Layer w8: v1(4634,4701) 4634,4632 4642.21,4623.79 U1.56
  Bottom Layer w8: OUT1.28 4265,4625.98 4280.98,4610 4619,4610 4634,4625 v1(4634,4701)
PD10: OUT1.33 U1.57 | length 1008.3
  Top Layer w8: U1.57 4661.89,4639.31 v1(4665.75,4643.17)
  Bottom Layer w8: OUT1.33 3992.95,4617.94 3992.95,4519.05 4011,4501 4522,4501 4540.5,4482.5 4578.65,4482.5 4665.75,4569.6 v1(4665.75,4643.17)
PD11: OUT1.29 U1.58 U2.5 | length 1615
  Top Layer w8: v1(4153,4625) v1(4323,4455) ; U1.58 4681.58,4525 4663.58,4507 v1(4653.5,4507) 4638,4507 4597.68,4466.68 4564.18,4466.68 4547,4449.5 4547,4394.5 4562.5,4379 4727,4379 4771.9,4334.1 4791.61,4334.1 4845,4280.7 4845,4225 4801,4225 4780,4246 4780,4283 U2.5
  Bottom Layer w8: v1(4153,4625) 4183.51,4594.49 OUT1.29 ; v1(4323,4455) 4323.5,4454.5 4532.5,4454.5 4561,4426 4561,4407 4575,4393 4614.46,4393 4633.96,4412.5 4633.96,4487.46 v1(4653.5,4507)
PD12: OUT1.32 U1.59 U2.2 | length 2238.3
  Top Layer w8: v1(4094.01,4608.5) 4105,4608.5 4129.5,4584 4129.5,4546.5 v1(4331.5,4344.5) ; U1.59 4701.26,4512 4668.76,4479.5 4637,4479.5 4610.18,4452.68 4574,4452.68 4561,4439.68 4561,4407 4575,4393 4683.5,4393 4727.5,4437 4750,4437 4912.5,4274.5 4912.5,4202.56 4925,4190.06 U2.2 5050,4190.06 5051,4191.06 v1(5051,4346)
  Bottom Layer w8: OUT1.32 4080,4594.49 v1(4094.01,4608.5) ; v1(4331.5,4344.5) 4569.5,4344.5 4575.97,4350.97 5046.03,4350.97 v1(5051,4346)
PD13: OUT1.30 U1.60 | length 833.4
  Top Layer w8: v1(4163,4572.5) v1(4266.75,4468.75) ; v1(4601,4420.5) 4646,4465.5 4700,4465.5 4720.95,4486.45 U1.60
  Bottom Layer w8: v1(4163,4572.5) 4172.51,4562.99 OUT1.30 ; v1(4266.75,4468.75) 4281,4483 4498.5,4483 4513,4468.5 4565.8,4468.5 4566.3,4468 4566.8,4468 4601,4433.8 v1(4601,4420.5) v1@4601,4433
PD14: OUT1.31 U1.61 | length 1174.1
  Top Layer w8: v1(4036,4530) 4036,4410.01 v1@4070.01,4376 ; v1(4723,4644) 4740.63,4626.37 U1.61
  Bottom Layer w8: v1@4036.42,4530 OUT1.31 ; v1@4068,4376 4452.64,4376 4470.14,4358.5 4554,4358.5 4574.5,4379 4660.1,4379 4693.6,4412.5 4693.6,4451.2 4710.5,4468.1 4710.5,4631.5 v1(4723,4644)
  other v1: 4068,4373
PD15: OUT2.30 U1.62 | length 1054.8
  Top Layer w8: U1.62 4760.32,4529 4752.5,4521.18 4752.5,4469 4753.95,4467.55 4781,4467.55 4781,4467.11 4815.5,4432.61 4815.5,4431.81 4839.81,4407.5 4840.61,4407.5 4881.74,4366.37 4928.37,4366.37 v1(4955,4393)
  Bottom Layer w8: v1(4955,4393) 4980,4418 5454.5,4418 5498,4461.5 5498,4562.99 OUT2.30
PE0: OUT2.46 U1.97 | length 379.7
  Top Layer w8: v1(5035,5082) 5041.8,5075.2 U1.97
  Bottom Layer w8: v1(5035,5082) 5045,5072 5239.43,5072 5276,5035.43 OUT2.46
PE1: OUT2.14 U1.98 | length 766.5
  Top Layer w8: U1.98 5171.53,5098.44 5241.06,5098.44 5392,5249.38 v1(5392,5271.5)
  Bottom Layer w8: v1(5392,5271.5) 5380,5259.5 5380,5040 5393.5,5026.5 5432.5,5026.5 5472.93,5066.93 OUT2.14
PE2: OUT2.47 U1.1 U2.3 | length 1873.9
  Top Layer w8: v1(4664,4427) 4688.5,4451.5 4760.5,4451.5 ; v1(4932,5075) 5016.22,5159.22 U1.1 ; U2.3@4971.94,4240.06 U2.3
  Top Layer w10: 4760.5,4451.5 U2.3@4971.94,4240.06
  Bottom Layer w8: v1(4664,4427) 4664,4452 4693.25,4481.25 4693.25,4868.25 4788,4963 4876.58,4963 4988.58,5075 ; v1(4932,5075) 4988.58,5075 ; OUT2.47 5269,5066.93 5225.99,5109.94 5023.52,5109.94 4988.58,5075
PE3: OUT2.13 U1.2 | length 2574.7
  Top Layer w8: U1.2 4996.54,5277.54 v1(5004,5285)
  Bottom Layer w8: v1(5004,5285) 5004,5120 4994,5110 4902,5110 4882,5130 4882,5900 4920.5,5938.5 5033.14,5938.5 5046.64,5925 5046.64,5777.96 5304.6,5520 5555,5520 5577,5498 5577,5112.5 5562.93,5098.43 OUT2.13
PE4: OUT2.48 U1.3 | length 542
  Top Layer w8: U1.3 4976.5,5257.85 4976.5,5300 v1(5009.28,5332.78)
  Bottom Layer w8: v1(5009.28,5332.78) 5037.65,5332.78 5272,5098.43 OUT2.48
PE5: OUT2.12 R4.2 U1.4 | length 2762.9
  Top Layer w8: U1.4 4957.17,5320.17 5034,5397 5034,5682 5070,5718 5348,5718 5382,5684 5382,5473 v1(5402,5453) ; R4.2 5167.95,4276.95 5448.5,4557.5 5448.5,4891 5443.5,4896 5382.5,4896 5366,4912.5 5366,5012 v1(5408,5054)
  Bottom Layer w8: v1@5402,5454 5402,5319 5419.5,5301.5 5419.5,5129.5 5419.65,5129.35 5408,5117.7 v1(5408,5054) ; 5420,5130 OUT2.12
PE6: OUT2.49 U1.5 | length 659.6
  Top Layer w8: U1.5 4937.48,5346.48 v1(4993.43,5402.43)
  Bottom Layer w8: v1@5003.5,5412.5 5003.5,5391.05 5264.63,5129.92 OUT2.49
PE7: OUT1.20 U1.37 | length 445.5
  Top Layer w8: U1.37 4511,4917.72 4526,4902.72 v1(4526,4877.95)
  Bottom Layer w8: OUT1.20 4272.45,4877.95 4273.5,4879 4273.5,4908 4275,4909.5 4436,4909.5 4467.55,4877.95 v1(4526,4877.95)
PE8: OUT1.41 U1.38 | length 471.8
  Top Layer w8: v1(4125.41,4885.86) 4157.95,4885.86 4219.36,4947.27 4360.73,4947.27 4409.97,4898.03 U1.38
  Bottom Layer w8: OUT1.41 4117.5,4877.95 v1(4125.41,4885.86)
PE9: OUT1.21 U1.39 | length 404.6
  Top Layer w8: v1(4167.36,4850.63) 4250,4933.27 4334.73,4933.27 4389.65,4878.35 U1.39
  Bottom Layer w8: v1(4167.36,4850.63) 4171.54,4846.46 OUT1.21
PE10: OUT1.40 U1.40 | length 511.3
  Top Layer w8: v1(4100.96,4846.46) 4127.41,4820 4184.59,4820 4247.36,4882.77 4247.36,4902.19 4264.44,4919.27 4328.33,4919.27 4388.94,4858.66 U1.40
  Bottom Layer w8: OUT1.40 v1(4100.96,4846.46)
PE11: OUT1.22 U1.41 | length 460.8
  Top Layer w8: U1.41 4517.02,4838.98 v1(4526,4830)
  Bottom Layer w8: OUT1.22 4262.5,4814.96 4287.5,4839.96 4287.5,4883 4300,4895.5 4406,4895.5 4471.5,4830 v1(4526,4830)
PE12: OUT1.39 U1.42 | length 542.1
  Top Layer w8: v1(4143.12,4789.96) 4226.32,4789.96 4261.36,4825 4261.36,4882.19 4275,4895.83 4331.97,4895.83 4408.51,4819.29 U1.42
  Bottom Layer w8: OUT1.39 4118.12,4814.96 v1(4143.12,4789.96)
PE13: OUT1.23 U1.43 | length 315.7
  Top Layer w8: v1(4315,4868) 4340,4868 4408.39,4799.61 U1.43
  Bottom Layer w8: OUT1.23 4255.46,4783.46 4315,4843 v1(4315,4868)
PE14: OUT1.38 U1.44 | length 511.3
  Top Layer w8: v1(4161,4745.96) 4213.96,4745.96 4308.5,4840.5 4345.02,4840.5 4403.16,4782.36 4416.67,4782.36 4416.67,4779.92 U1.44
  Bottom Layer w8: OUT1.38 4100,4783.46 4121,4762.46 4157,4762.46 4161,4758.46 v1(4161,4745.96)
PE15: OUT1.24 U1.45 | length 284.8
  Top Layer w8: v1(4333,4813) 4380,4766 4406.24,4766 4412,4760.24 U1.45
  Bottom Layer w8: OUT1.24 4271.97,4751.97 v1(4333,4813)
RTC_BAT: D1.2 OUT2.11 | length 767.2
  Top Layer w10: D1.2 5221.79,5510.79 v1(5228,5517)
  Bottom Layer w8: v1(5228,5517) 5240.5,5504.5 5548.5,5504.5 5556,5497 5556,5162.42 ; OUT2.11 5555,5161.42
SWCLK: OUT2.36 SWD.3 U1.76 | length 1482.5
  Top Layer w8: v1(5085.92,4081.92) 5150,4146 5150,4288 5434.5,4572.5 5434.5,4678 5391.5,4721 v1@5272,4721 ; U1.76 5214.81,4661.81 v1(5272,4719)
  Bottom Layer w8: SWD.3 4861.92,4081.92 v1(5085.92,4081.92) ; v1(5272,4719) 5273.47,4720.47 OUT2.36
SWDIO: OUT2.25 SWD.2 U1.72 | length 2282
  Top Layer w8: v1(4816.5,4254) 4816.5,4285.25 4783,4318.75 4729.35,4318.75 4689.6,4358.5 4489,4358.5 4475.5,4372 4475.5,4571.5 4527,4623 4527,4675 4628,4776 4928,4776 4957.17,4746.83 U1.72 ; v3(5118,4615) 5133,4630 v2@5384,4630
  Top Layer w10: v2@5384,4630 v2(5391,4637)
  Bottom Layer w8: SWD.2 4700,4137.5 v1(4816.5,4254) ; v3(4957.5,4673.5) 5016,4615 v3(5118,4615) ; v2@5399.79,4637 OUT2.25@5483.26,4720.47
  Bottom Layer w10: OUT2.25@5483.26,4720.47 OUT2.25
V_RTC: C5.2 C6.2 D1.3 U1.6 | length 694.1
  Top Layer w8: U1.6 4917.8,5380.8 v1@5003.5,5466.5 ; v1@5064,5581 5092.21,5609.21 D1.3 5140,5619 5180,5659 C6.2 C5.2
  Bottom Layer w8: v1(5003,5467) 5003,5531 5052,5580 v1(5065,5580)
VREF: OUT1.13 R3.2 U1.20 | length 918.3
  Top Layer w8: v1(4381,5135) 4450,5204 4450,5449.32 4449,5450.32 R3.2 ; v1@4642.21,5127 U1.20
  Bottom Layer w8: OUT1.13 4249,5098.43 4282.57,5132 4369.09,5132 4381,5132.09 v1@4637.3,5132.09 ; v1@4381,5122.09 v1(4381,5135) ; v1(4634,5132) 4637.21,5132 v1@4637.3,5132.09 ; v1@4642.21,5127 v1@4637.3,5132.09
pads on no net: OUT1.6 OUT1.7 OUT1.8 OUT1.9 OUT1.51 OUT1.52 OUT1.53 OUT1.54 OUT1.55 OUT2.6 OUT2.7 OUT2.8 OUT2.9 OUT2.10 OUT2.51 OUT2.52 OUT2.53 OUT2.54 OUT2.55 U3.9 U4.3 U4.7

## Polygon pours and split planes (outlines as drawn)
GND on Top Layer "Top Layer-No Net" (hatched 90Degree grid 20 track 6, remove dead copper, pour order 0): 4055.12,6102.36 5492.13,6102.36 5610.24,5984.25 5610.24,4055.12 5492.13,3937.01 4055.12,3937.01 3937.01,4055.12 3937.01,5984.25
GND on Bottom Layer "Top Layer-No Net" (hatched 90Degree grid 20 track 6, remove dead copper, pour order 2): 3937.01,5984.25 4055.12,6102.36 5492.13,6102.36 5610.24,5984.25 5610.24,5921 5610.24,4055.12 5492.13,3937.01 5426,3937.01 4055.12,3937.01 3937.01,4055.12

## Keep-outs
Top Layer:
  circle w10: c4055,4055 r117.99
  circle w10: c5492.13,5984.25 r118.11
  lines w10: 3937.01,4055.12 3937.01,5984.25 cw(c4055.12,5984.25) 4055.12,6102.36 5393.7,6102.36 5492.13,6102.36 ; 4055.12,3937.01 5492.13,3937.01 ccw(c5492.13,4055.12) 5610.24,4055.12 5610.24,5984.25
Bottom Layer:
  circle w10: c5492.13,5984.25 r118.11
  circle w10: c4055,4055 r117.99
  lines w10: 3937.01,4055.12 3937.01,5984.25 cw(c4055.12,5984.25) 4055.12,6102.36 5492.13,6102.36 ; 4055.12,3937.01 5492.13,3937.01 ccw(c5492.13,4055.12) 5610.24,4055.12 5610.24,5984.25
Keep-Out Layer:
  lines w10: 3937.01,4055.12 3937.01,5984.25 cw(c4055.12,5984.25) 4055.12,6102.36 5492.13,6102.36 ; 4055.12,3937.01 5492.13,3937.01 ccw(c5492.13,4055.12) 5610.24,4055.12 5610.24,5984.25

## Silkscreen, mask and mechanical layers (free items; w line width, h text height)
Top Overlay:
  circle w10: c5492.13,5984.25 r118.11
  circle w10: c4055.12,4055.12 r118.11
  lines w10: 3937.01,4055.12 3937.01,5984.25 cw(c4055.12,5984.25) 4055.12,6102.36 5492.13,6102.36 ; 4055.12,3937.01 5492.13,3937.01 ccw(c5492.13,4055.12) 5610.24,4055.12 5610.24,5984.25
  text "*Made on Earth by humans*" at 3976.38,5500 h39.37 r270
Bottom Overlay:
  drawing of 3044 lines, arcs and shapes, not listed
  text "By S6+" at 4868,4820 h80
Mechanical 1:
  lines w10: 3937.01,4055.12 ccw(c4055.12,4055.12) 4055.12,3937.01 ; 5492.13,6102.36 cw(c5492.13,5984.25) 5610.24,5984.25